# Altium PCB 深圳重合闸控制板.PcbDoc (part 2 of 2)
Units mm, origin at the board's own origin, x right, y up, seen from the top; angles counter-clockwise.
Board outline 137 x 115 mm, 2 copper layers (Top Layer, Bottom Layer); 314 components, 196 nets, 866 pads, 368 vias.
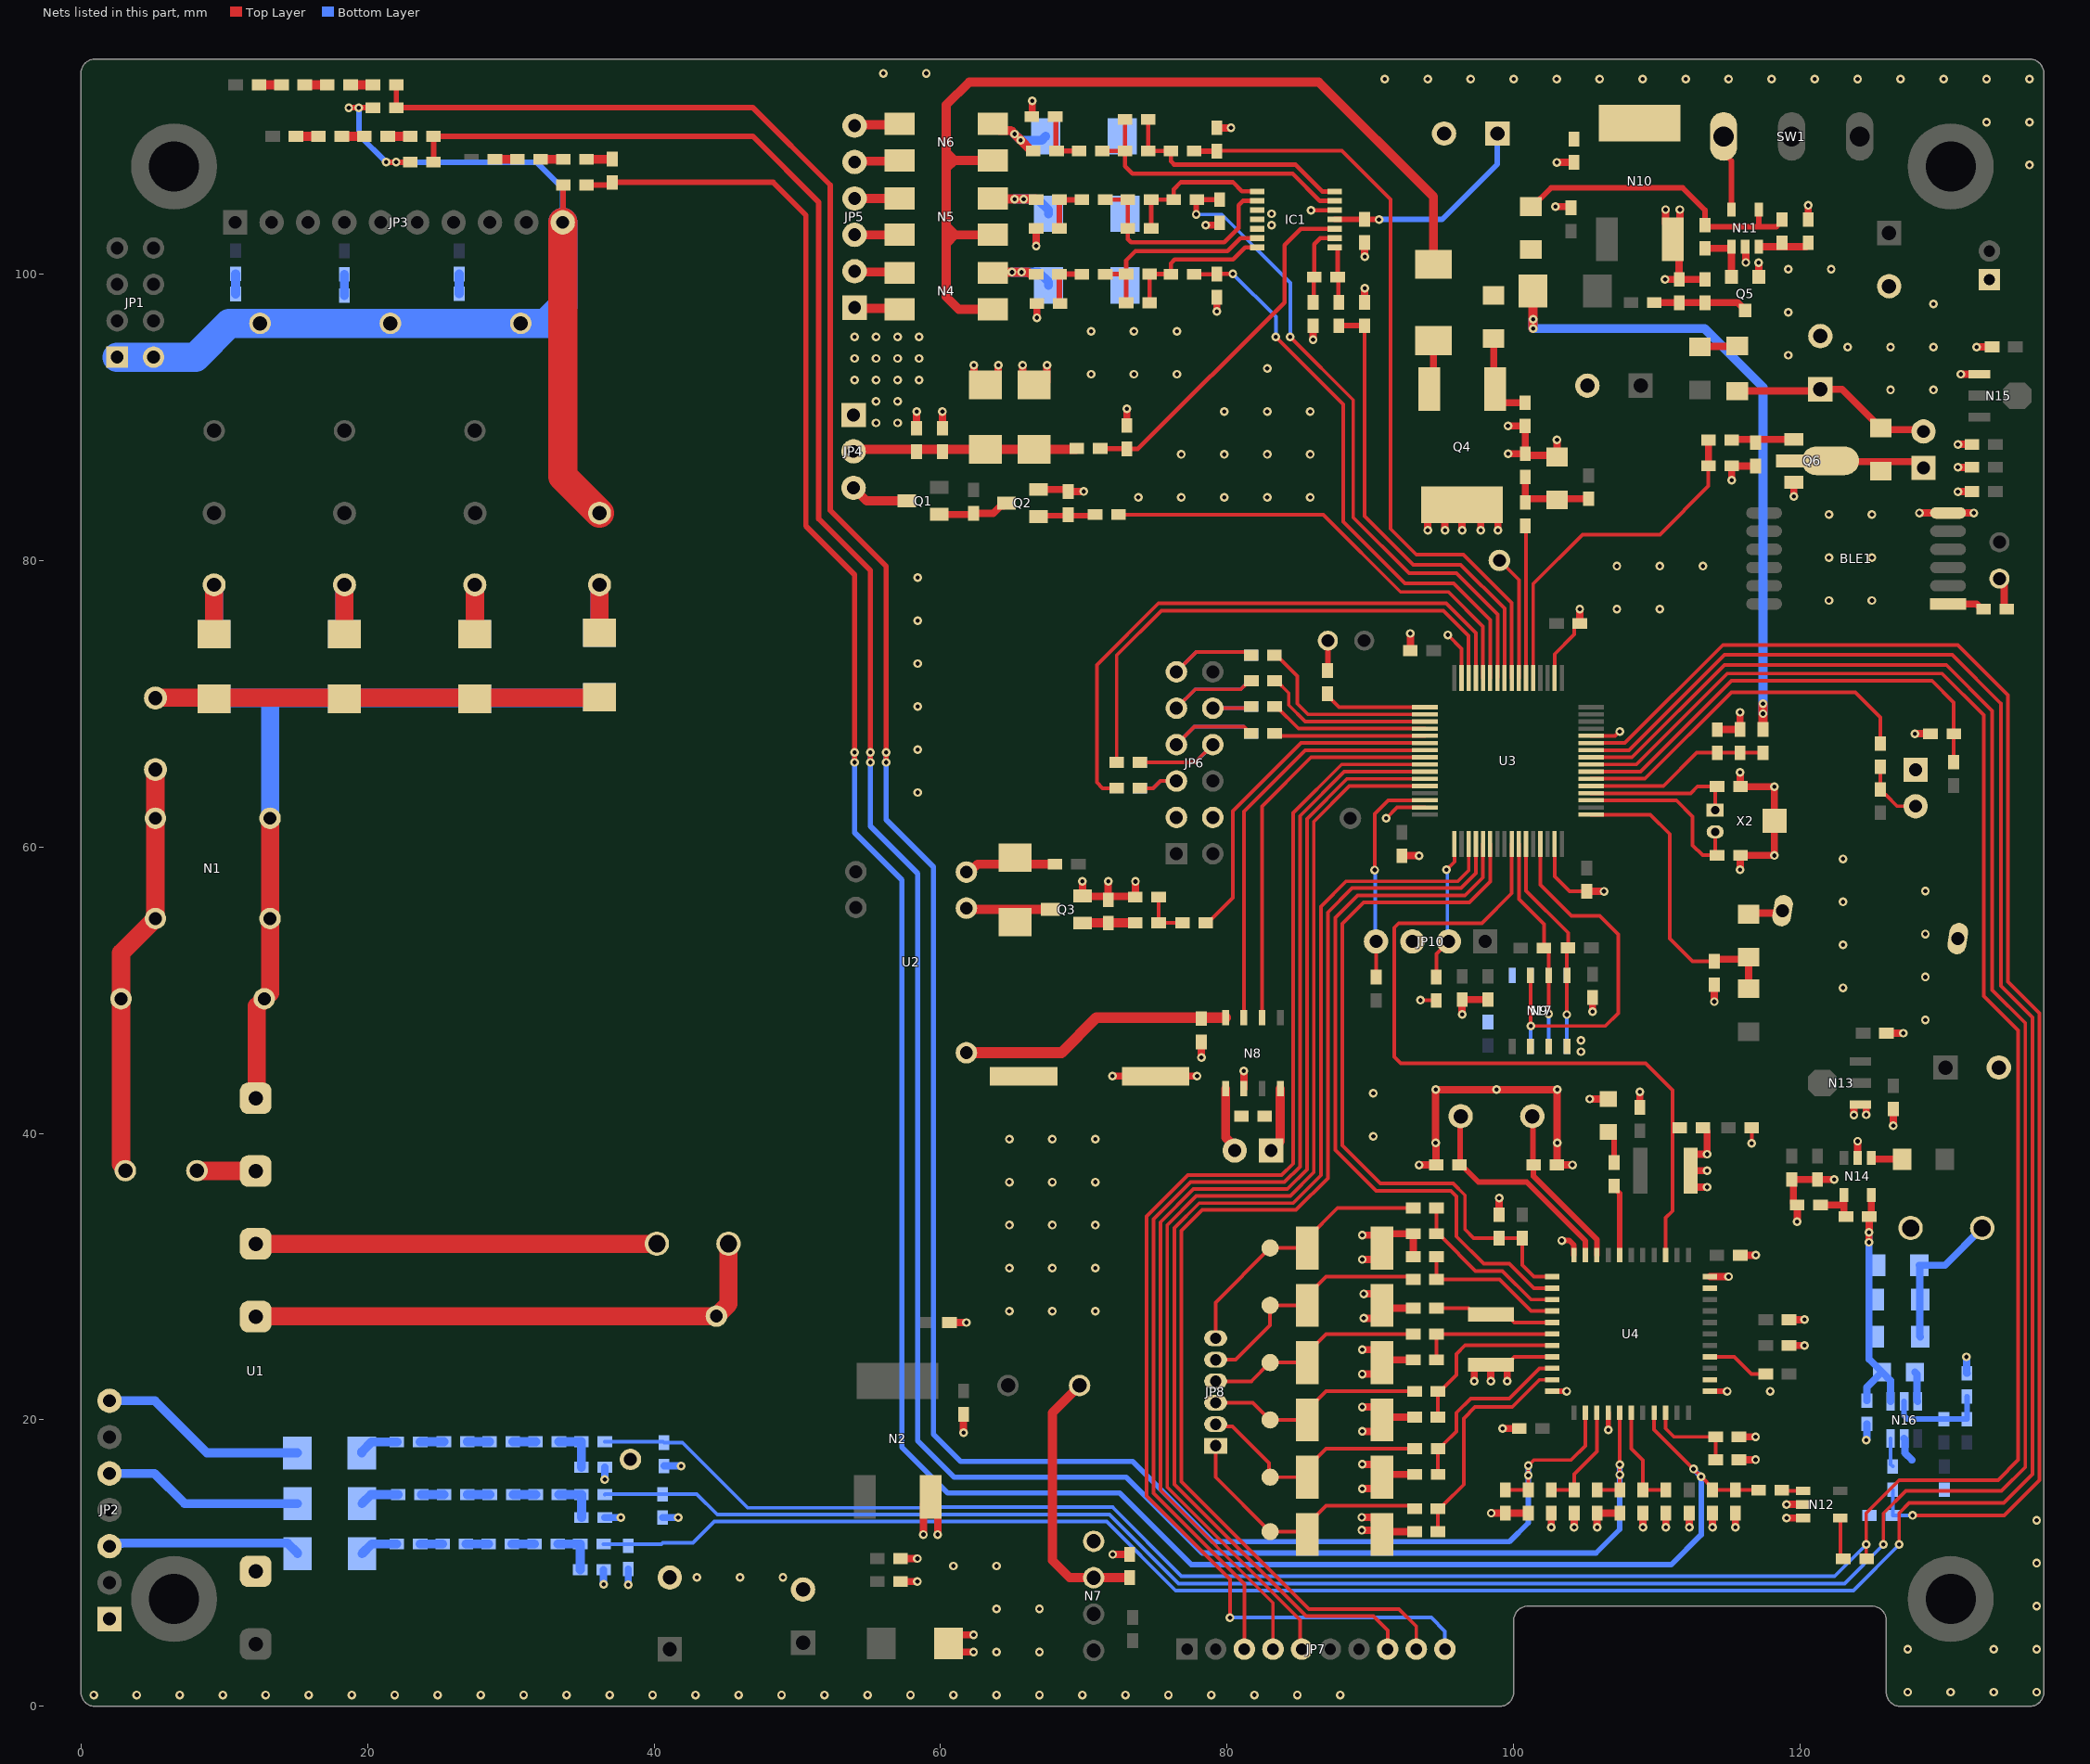
[diagram p2: the nets of this part, all layers, seen from the top]

## Via types
v1: diameter 0.61, hole 0.305, Top Layer to Bottom Layer, tented both sides, 368 vias

## Nets (pads, with @x,y where several pads share a name; then routed paths per layer and width w, separated by ;. In a path a pad name is that pad's centre, name@x,y a point inside that pad or via, vN(x,y) a via of type N, cw(c..) or ccw(c..) an arc to the next point about the centre after c; other vN are vias at no path point) (continued)
GND: BAT1.2 BLE1.6 C1.2 C3.2 C4.1 C5.1 C6.1 C7.1 C8.1 C9.2 C10.1 C11.1 C12.1 C13.1 C15.1 C18.1 C20.1 C22.1 C23.2 C24.2 C25.2 C26.1 C27.2 C28.1 C29.1 C30.1 C31.1 C32.1 C33.2 C34.2 C35.2 C36.2 C37.2 C38.2 C39.2 C40.2 C41.2 C42.2 C43.2 C44.2 C45.1 C46.2 C47.2 C48.2 C49.2 C50.1 C51.2 C52.1 C53.1 C54.1 C55.2 C56.1 C57.1 C58.2 C59.1 C60.1 C61.2 C62.2 C63.1 C64.1 C65.2 C66.2 C67.2 C68.2 C69.1 C70.2 C71.1 C72.2 C73.2 C74.1 C75.1 C76.1 C77.1 C79.2 C80.2 C81.2 C82.2 C83.2 C84.2 CR2.1 CR3.1 CR4.1 CX2.1 D5.1 D7.2 D10.1 IC1.5 IC1.10 IC1.11 IC1.12 JP1.1 JP1.2 JP2.1 JP3.10 JP4.1 JP6.3 JP6.4 JP10.3 JP11.1 JP13.1 LED1.2 N2.3 N3.2 N7.1 N8.6 N9.2 N9.3 N9.4 N10.3 N11.2 N12.2 N12.3 N13.1 N14.2 N15.1 N16.2 N17.1 N17.2 N17.3 N17.4 Q2.2 Q3.2 Q4.2 Q5.2 Q6.3 R9.1 R11.1 R16.1 R18.2 R20.1 R26.1 R38.2 R43.2 R44.2 R45.2 R50.2 R51.2 R52.2 R53.2 R54.2 R55.2 R56.2 R67.1 R70.2 R72.1 R73.2 R75.2 R77.1 R79.2 R81.2 R82.1 R83.1 R85.2 R87.1 R88.1 R90.1 R95.2 R96.2 R103.2 R108.2 R115.2 R117.2 R119.2 R130.2 R135.2 R137.2 Rp1.2 Rp2.2 Rp3.2 U1.14 U3.12 U3.18 U3.31 U3.47 U3.63 U4.8 U4.11 U4.15 U4.23 U4.24 U4.32 U4.33 U4.44 X2.3 | length 347.5
  Top Layer w0.254: v1(91.1,62) 91.854,62.754 U3.47@93.8,62.754 ; v1(93.5,49.3) 94.587,49.3 R67.1@94.6,49.287 ; v1(95.4,74.8) 96.359,73.841 U3.31@96.359,71.8 ; C35.2@97.25,23.477 97.623,23.85 C35.2@98.4,23.85 99.5,23.85 99.55,23.9 100.05,24.4 U4.8@102.7,24.4 ; U3.63@102.859,60.2 102.859,57.941 103.9,56.9 C47.2@105.1,56.9 ; U3.18@102.859,71.8 102.859,73.459 104.232,74.832 104.232,75.346 104.486,75.6 C43.2@104.613,75.6 ; U3.12@105.4,67.754 107.073,67.754 107.372,68.053 v1(107.4,68.053) ; v1(116.613,39.313) C60.1@116.613,40.4
  Top Layer w0.305: v1(85.85,104.45) IC1.5@87.5,104.45
  Top Layer w0.381: v1(18.7,111.6) v1(19.4,111.6) R9.1@20.387,111.6 ; v1(21.3,107.8) v1(22,107.8) R11.1@22.987,107.8 ; JP3.10@33.63,103.6 33.648,103.618 33.648,106.182 R16.1@33.666,106.2 ; U4.11@102.5,22 v1(103.7,22) ; v1(103.355,32.522) 103.878,32.522 104.2,32.2 U4.44@104.2,31.5 ; v1(106.6,19.3) U4.15@106.6,20.5 ; U4.23@113.7,22 v1(114.9,22)
  Top Layer w0.5: v1(115.8,58.4) 115.813,58.413 115.813,59.406 C58.2@115.826,59.419 115.835,59.41 118.191,59.41 v1(118.2,59.4) v1(118.2,64.2) 118.191,64.209 115.835,64.209 C59.1@115.826,64.219 115.813,64.231 115.813,65.187 v1(115.8,65.2)
  Top Layer w0.508: C4.1@57.208,8.719 v1(58.381,8.719) ; C5.1@57.208,10.319 v1(58.381,10.319) ; C6.1@58.327,89.41 v1(58.327,90.397) ; v1(58.8,12) 58.8,14.126 N2.3@59.3,14.626 59.8,14.126 v1(59.8,12) ; R20.1@60.127,89.41 v1(60.127,90.398) ; C7.1@60.613,26.8 v1(61.8,26.8) ; v1(61.6,19.1) C8.1@61.6,20.387 ; v1(62.3,3.8) 61.15,3.8 N3.2@60.55,4.4 61.15,5 v1(62.3,5) ; D5.1@62.327,92.46 v1(62.327,93.629) ; D5.1@64.027,92.46 v1(64.027,93.629) ; D7.2@65.727,92.46 v1(65.727,93.629) ; C10.1@66.4,111.1 v1(66.4,112.087) ; v1(66.67,101.943) C11.1@66.67,102.93 ; v1(66.72,96.943) C12.1@66.72,97.93 ; Q2.2@66.84,84.95 68.773,84.95 68.9,84.823 R26.1@68.9,84.813 v1(69.987,84.813) ; D7.2@67.427,92.46 v1(67.427,93.629) ; v1(69.902,57.598) Q3.2@69.902,56.587 69.945,56.544 C13.1@71.7,56.544 ; C13.1@71.7,56.313 C13.1@71.7,56.544 ; v1(71.7,57.6) C13.1@71.7,56.544 ; v1(72,44) C9.2@75,44 v1(77.9,44) ; v1(72.013,10.613) C18.1@73.2,10.613 ; C15.1@73,89.6 v1(73,90.587) ; v1(73.6,57.587) 73.6,56.513 R38.2@73.587,56.5 73.544,56.544 C13.1@71.7,56.544 ; v1(78.2,45.3) C20.1@78.2,46.387 ; v1(78.5,103.4) 79.355,103.4 79.482,103.527 R45.2@79.482,103.568 ; v1(79.282,97.381) R43.2@79.282,98.368 ; R44.2@79.282,110.194 v1(80.27,110.194) ; N8.6@81.165,43.125 v1(81.165,44.365) ; v1(86,95.4) R56.2@86,96.387 ; v1(89.4,12.3) 90.5,12.3 R50.2@90.8,12 ; v1(89.4,13.2) 90.254,13.2 90.8,12.654 R50.2@90.8,12.354 ; v1(89.431,15.2) R51.2@90.6,15.2 ; v1(89.431,16.9) R51.2@90.6,16.9 ; v1(89.431,19.2) R52.2@90.6,19.2 ; v1(89.431,20.9) R52.2@90.6,20.9 ; v1(89.431,23.2) R53.2@90.6,23.2 ; v1(89.431,24.9) R53.2@90.6,24.9 ; v1(89.431,31.2) R55.2@90.6,31.2 ; v1(89.431,32.9) R55.2@90.6,32.9 ; v1(89.531,27.1) R54.2@90.7,27.1 ; v1(89.531,28.8) R54.2@90.7,28.8 ; C23.2@89.6,98.013 v1(89.6,99) ; v1(89.6,101.2) C22.1@89.6,102.187 ; R50.2@90.254,12.9 R50.2@90.8,12.354 ; R51.2@90.8,16 91,16.2 C32.1@93.092,16.2 ; R52.2@90.8,20 90.988,20.188 C31.1@93.084,20.188 ; R53.2@90.8,24 90.994,24.194 C26.1@92.987,24.194 ; R54.2@90.8,28 91,27.8 C27.2@92.987,27.8 ; R55.2@90.8,32 90.8,32.454 91.346,33 C29.1@92.987,33 C28.1@92.987,31.4 ; C24.2@92.2,59.387 v1(93.4,59.387) ; C25.2@92.787,73.7 v1(92.787,74.9) ; C30.1@93.082,12.2 91,12.2 R50.2@90.8,12 ; v1(93.4,37.8) C34.2@94.587,37.8 94.567,37.82 94.567,39.327 v1(94.548,39.347) 94.554,39.353 94.554,43.052 v1(94.561,43.058) ; v1(94,82.1) Q4.2@94,83.3 ; v1@94.561,43.059 v1(98.798,43.059) v1@103.035,43.059 ; v1(95.2,82.1) Q4.2@95.2,83.3 ; v1(96.4,48.3) 96.4,49.336 C36.2@96.407,49.343 C37.2@98.207,49.343 ; v1(96.4,82.1) Q4.2@96.4,83.3 ; v1(97.25,22.7) C35.2@97.25,23.477 ; v1(97.7,82.1) Q4.2@97.7,83.3 ; v1(98.4,22.7) C35.2@98.4,23.85 ; v1(98.432,13.492) C39.2@99.419,13.492 R73.2@101.019,13.492 ; v1(98.9,82.1) Q4.2@98.9,83.3 ; C38.2@98.986,34.317 v1(98.986,35.486) ; v1(99.231,19.4) C40.2@100.4,19.4 ; v1(99.55,22.7) C35.2@99.55,23.9 ; v1(99.6,89.387) R70.2@100.8,89.387 100.806,89.381 100.806,87.449 R72.1@100.813,87.443 ; v1(99.613,87.443) R72.1@100.813,87.443 ; v1(102.619,12.505) C42.2@102.619,13.492 ; v1(102.913,104.7) C45.1@103.9,104.7 ; v1(103,107.787) C46.2@104.2,107.787 ; v1(103.022,88.421) D10.1@103.022,87.221 102.911,87.332 100.924,87.332 R72.1@100.813,87.443 ; v1(103.036,43.06) v1(103.036,39.34) 103.036,37.823 C41.2@103.013,37.8 v1(104.1,37.8) ; v1(104.219,12.505) R75.2@104.219,13.492 ; C43.2@104.613,75.6 v1(104.613,76.595) ; C47.2@105.1,56.9 v1(106.3,56.9) ; v1(105.3,42.4) LED1.2@106.6,42.4 ; v1(105.5,48.5) R77.1@105.5,49.487 ; v1(105.819,12.505) C48.2@105.819,13.492 R79.2@107.419,13.492 ; C50.1@108.8,41.813 v1(108.8,42.9) ; v1(109.019,12.505) C51.2@109.019,13.492 ; v1(110.563,99.613) R82.1@111.55,99.613 ; N10.3@110.6,103.5 v1(110.6,104.487) ; v1(110.619,12.505) R81.2@110.619,13.492 ; N10.3@111.1,102.426 111.55,101.976 R82.1@111.55,99.613 ; N10.3@111.6,103.5 v1(111.6,104.487) ; v1(112.257,12.505) C53.1@112.257,13.492 ; C52.1@113.213,40.4 113.246,40.4 113.5,40.146 v1(113.5,38.55) 112.723,38.55 112.35,38.177 C49.2@112.35,37.4 ; R83.1@113.35,99.613 R82.1@111.55,99.613 ; v1(113.5,36.25) 112.723,36.25 112.35,36.623 C49.2@112.35,37.4 ; v1(113.5,37.4) C49.2@112.35,37.4 ; U4.33@113.7,30 v1(115,30) ; v1(113.876,12.505) C54.1@113.876,13.492 ; v1(114,49.2) C55.2@114,50.387 ; R88.1@114.213,68.19 114.218,68.195 115.789,68.195 C61.2@115.794,68.2 v1(115.794,69.4) ; R85.2@115.213,86.6 R85.2@115.216,86.597 ; v1(115.216,85.609) R85.2@115.216,86.597 ; v1(115.476,12.505) R90.1@115.476,13.492 ; C56.1@115.72,17.219 v1(116.881,17.219) ; R87.1@115.72,18.819 v1(116.881,18.819) ; C57.1@115.813,31.5 v1(116.9,31.5) ; N11.2@116.15,101.905 116.2,101.855 v1(116.2,100.8) ; C62.2@116.879,86.587 116.873,86.594 115.219,86.594 R85.2@115.216,86.597 ; Q5.2@117.1,99.8 v1(117.1,100.787) ; v1(119.044,13.15) N12.3@120.205,13.15 ; v1(119.044,14.1) N12.2@120.205,14.1 ; C63.1@119.213,25.2 v1(120.3,25.2) ; C64.1@119.213,27 v1(120.3,27) ; v1(119.55,84.463) Q6.3@119.55,85.45 ; v1(119.787,33.839) R95.2@119.787,35 119.66,35 119.514,35.146 119.514,36.673 C66.2@119.4,36.787 R96.2@121.2,36.787 v1(122.361,36.787) ; C67.2@120.55,103.8 v1(120.55,104.787) ; v1(123.744,41.283) 123.744,41.971 123.79,42.017 N13.1@124.194,42.017 124.554,42.017 124.6,41.971 v1(124.6,41.3) ; N14.2@124,38.295 v1(124,39.456) ; C69.1@126.013,47 v1(127.2,47) ; v1(126.489,40.543) C71.1@126.489,41.704 ; v1(128,67.9) C73.2@129.087,67.9 ; v1(128.312,83.312) BLE1.6@130.312,83.312 v1(132.112,83.312) ; v1(131,84.8) C74.1@131.987,84.8 ; v1(131,86.5) C75.1@131.987,86.5 ; v1(131,88.1) C76.1@131.987,88.1 ; v1(131.2,93) N15.1@132.5,93 ; v1(132.3,94.9) C77.1@133.387,94.9 ; R50.2@90.8,12 R50.2@90.8,12.354
  Top Layer w2.032: JP3.10@33.63,103.6 33.63,85.87 R18.2@36.2,83.3
  Bottom Layer w0.381: v1(18.7,111.6) v1(19.4,111.6) 19.4,109.7 v1(21.3,107.8) v1(22,107.8) 31.787,107.8 33.63,105.957 JP3.10@33.63,103.6
  Bottom Layer w0.508: v1(36.479,8.521) R119.2@36.479,9.535 ; v1(36.563,15.837) R117.2@36.563,16.7 ; R115.2@36.568,13.181 v1(37.681,13.181) ; v1(38.2,8.5) C84.2@38.2,9.587 ; C83.2@40.6,13.187 v1(41.687,13.187) ; C82.2@40.7,16.787 v1(41.887,16.787) ; v1(124.6,18.6) 124.6,18.627 124.65,18.677 C80.2@124.65,19.725 ; N16.2@127.25,18.695 127.296,18.649 127.296,17.704 127.8,17.2 ; v1(131.6,24.4) 131.616,24.384 131.616,23.271 R103.2@131.631,23.255
  Bottom Layer w2.032: JP1.1@2.53,94.19 JP1.2@5.07,94.19 7.99,94.19 10.349,96.549 Rp3.2@30.7,96.55 32.44,96.55 33.63,97.74 JP3.10@33.63,103.6
  other v1: 0.9,0.8 3.9,0.8 6.9,0.8 9.9,0.8 12.9,0.8 15.9,0.8 18.9,0.8 21.9,0.8 24.9,0.8 27.9,0.8 30.9,0.8 33.9,0.8 36.9,0.8 39.9,0.8 42.9,0.8 45.9,0.8 48.9,0.8 51.9,0.8 54.9,0.8 57.9,0.8 60.9,0.8 63.9,0.8 66.9,0.8 69.9,0.8 72.9,0.8 75.9,0.8 78.9,0.8 81.9,0.8 84.9,0.8 87.9,0.8 127.5,1 130.5,1 133.5,1 136.5,1 63.9,3.8 66.9,3.8 127.5,4 133.5,4 136.5,4 63.9,6.8 66.9,6.8 136.5,7 43,9 46,9 49,9 60.9,9.8 63.9,9.8 136.5,10 136.5,13 117.9,22 64.8,27.6 67.8,27.6 70.8,27.6 64.8,30.6 67.8,30.6 70.8,30.6 64.8,33.6 67.8,33.6 70.8,33.6 64.8,36.6 67.8,36.6 70.8,36.6 64.8,39.6 67.8,39.6 70.8,39.6 90.2,39.8 90.2,42.8 104.7,45.7 104.7,46.5 128.728,47.92 122.991,50.165 128.728,50.92 122.991,53.165 128.728,53.92 122.991,56.165 128.728,56.92 122.991,59.165 58.4,63.8 58.4,66.8 58.4,69.8 58.4,72.8 58.4,75.8 107.2,76.6 110.2,76.6 122,77.2 125,77.2 58.4,78.8 107.2,79.6 110.2,79.6 113.2,79.6 122,80.2 125,80.2 122,83.2 125,83.2 73.8,84.4 76.8,84.4 79.8,84.4 82.8,84.4 85.8,84.4 76.8,87.4 79.8,87.4 82.8,87.4 85.8,87.4 55.5,89.6 57,89.6 79.8,90.4 82.8,90.4 85.8,90.4 55.5,91.1 57,91.1 126.3,91.9 129.3,91.9 54,92.6 55.5,92.6 57,92.6 58.5,92.6 70.5,93 73.5,93 76.5,93 82.8,93.4 54,94.1 55.5,94.1 57,94.1 58.5,94.1 119.156,94.325 123.3,94.9 126.3,94.9 129.3,94.9 54,95.6 55.5,95.6 57,95.6 58.5,95.6 70.5,96 73.5,96 76.5,96 119.156,97.325 129.3,97.9 119.156,100.325 122.156,100.325 83.1,103.4 83.1,104.2 136,107.6 133,110.6 136,110.6 91,113.6 94,113.6 97,113.6 100,113.6 103,113.6 106,113.6 109,113.6 112,113.6 115,113.6 118,113.6 121,113.6 124,113.6 127,113.6 130,113.6 133,113.6 136,113.6 56,114 59,114
GND1: CX1.1 D17.1 D18.1 D22.1 D23.1 N1.2 N1.4 U1.1 | length 55.3
  Top Layer w1.27: U1.1@12.2,42.45 12.284,42.534 12.284,48.884 CX1.1@12.8,49.4 13.2,49.8 N1.2@13.2,55 N1.4@13.2,62
  Bottom Layer w1.27: D23.1@9.3,70.35 9.35,70.4 13.128,70.4 ; N1.4@13.2,62 13.2,70.328 13.128,70.4 ; D17.1@36.2,70.45 36.15,70.4 13.128,70.4
IRQ: U3.53 U4.2 | length 50.8
  Top Layer w0.254: U3.53@97.859,60.2 97.859,57.859 96.6,56.6 89.1,56.6 87.548,55.048 87.548,38.852 90.4,36 95.6,36 96,35.6 96,32.8 97.9,30.9 99.7,30.9 101.4,29.2 U4.2@102.7,29.2
LCD_RX: JP7.4 U3.43 | length 78.7
  Top Layer w0.254: JP7.4@83.2,4 83.2,7.228 75.335,15.093 75.335,33.807 77.645,36.117 84.2,36.117 85.565,37.483 85.565,61.965 88.354,64.754 U3.43@93.8,64.754
LCD_TX: JP7.3 U3.42 | length 78.9
  Top Layer w0.254: JP7.3@81.2,4 81.2,8.545 74.852,14.893 74.852,34.007 77.445,36.6 84,36.6 85.083,37.683 85.083,62.165 88.172,65.254 U3.42@93.8,65.254
LED: R58.1 U3.33 | length 7.3
  Top Layer w0.254: R58.1@87,70.687 87,70.56 87.806,69.754 U3.33@93.8,69.754
NetA1_1: A1.1 JP8.1 R50.1 R64.2 | length 19.1
  Top Layer w0.254: JP8.1@79.2,18.2 79.2,16 A1.1@83,12.2 85.4,12.2 R50.1@85.6,12 85.6,12.7 86.9,14 92.882,14 R64.2@93.082,13.8
NetA2_1: A2.1 JP8.2 R51.1 R66.2 | length 17.2
  Top Layer w0.254: JP8.2@79.2,19.7 79.362,19.538 80.355,19.538 82.912,16.981 82.912,16.088 A2.1@83,16 R51.1@85.6,16 85.6,16.7 86.9,18 87.229,18 R66.2@93.092,18
NetA3_1: A3.1 JP8.3 R52.1 R65.2 | length 15.6
  Top Layer w0.254: JP8.3@79.2,21.2 81.8,21.2 A3.1@83,20 R52.1@85.6,20 85.6,20.7 86.9,22 93.071,22 R65.2@93.084,21.987
NetA4_1: A4.1 JP8.4 R53.1 R61.2 | length 15.6
  Top Layer w0.254: JP8.4@79.2,22.7 81.7,22.7 A4.1@83,24 R53.1@85.6,24 85.6,24.7 86.9,26 92.981,26 R61.2@92.987,25.994
NetA5_1: A5.1 JP8.5 R54.1 R62.2 | length 17.5
  Top Layer w0.254: JP8.5@79.2,24.2 80.6,24.2 83,26.6 A5.1@83,28 R54.1@85.6,28 85.6,28.7 86.9,30 92.787,30 R62.2@92.987,29.8
NetA6_1: A6.1 JP8.6 R55.1 R63.2 | length 19.4
  Top Layer w0.254: JP8.6@79.2,25.7 79.2,28.2 A6.1@83,32 R55.1@85.6,32 85.6,32.7 87.7,34.8 R63.2@92.987,34.8
NetBAT1_1: BAT1.1 D13.1 | length 2.5
  Top Layer w0.5: D13.1@116.394,55.3 116.479,55.386 118.606,55.386 BAT1.1@118.77,55.55
NetBLE1_1: BLE1.1 R102.2 | length 2.6
  Top Layer w0.5: BLE1.1@130.312,76.962 132.298,76.962 132.66,76.6 R102.2@132.787,76.6
NetC3_2: C12.2 R23.1 R29.2 | length 3.6
  Top Layer w0.381: C12.2@68.295,97.93 R23.1@68.295,99.981 R29.2@69.87,99.981
NetC5_1: C16.1 IC1.14 R35.1 R39.2 | length 10.8
  Top Layer w0.305: C16.1@74.578,97.982 R35.1@74.578,99.994 74.585,99.988 76.063,99.988 R39.2@76.07,99.981 76.07,100.734 76.335,101 80.4,101 81.25,101.85 IC1.14@82.1,101.85
NetC5_2: C16.2 IC1.13 R29.1 R35.2 | length 14
  Top Layer w0.305: R29.1@71.495,99.981 71.502,99.988 72.946,99.988 R35.2@72.953,99.994 C16.2@72.953,97.982 ; R35.2@72.953,100.194 72.953,100.953 73.6,101.6 80.026,101.6 80.926,102.5 IC1.13@82.1,102.5
NetC6_2: C59.2 U3.4 X2.1 | length 10.7
  Top Layer w0.254: U3.4@105.4,63.746 112.346,63.746 112.819,64.219 C59.2@114.2,64.219 114.063,64.081 X2.1@114.063,62.569
NetC7_1: C58.1 U3.3 X2.2 | length 13.2
  Top Layer w0.254: U3.3@105.4,63.238 111.362,63.238 112.487,62.113 112.487,60.113 113.181,59.419 C58.1@114.2,59.419 114.063,59.556 X2.2@114.063,61.049
NetC8_1: C41.1 U4.42 X1.1 | length 11.6
  Top Layer w0.381: X1.1@101.3,41.2 101.344,41.156 101.344,37.844 C41.1@101.387,37.8 101.387,37.013 105.8,32.6 U4.42@105.8,31.5
NetC9_1: C55.1 D12.2 D13.2 U3.1 | length 21.8
  Top Layer w0.254: U3.1@105.4,62.254 109.546,62.254 110.9,60.9 110.9,53.6 112.487,52.013 C55.1@114,52.013
  Top Layer w0.5: C55.1@114,52.013 114,52.025 114.131,52.156 116.25,52.156 D13.2@116.394,52.3 D12.2@116.394,50.1
NetC11_1: C34.1 U4.43 X1.2 | length 15.4
  Top Layer w0.381: X1.2@96.3,41.2 96.256,41.156 96.256,37.843 C34.1@96.213,37.8 96.34,37.8 97.54,36.6 100.902,36.6 105,32.502 U4.43@105,31.5
NetC14_2: C11.2 R24.1 R30.2 | length 3.6
  Top Layer w0.381: C11.2@68.295,103.181 R24.1@68.295,105.181 R30.2@69.87,105.181
NetC16_1: C17.1 IC1.8 R36.1 R41.2 | length 10.6
  Top Layer w0.305: C17.1@74.695,103.181 R36.1@74.695,105.181 R41.2@76.27,105.181 76.27,105.912 76.758,106.4 80.4,106.4 81.04,105.76 82.091,105.76 IC1.8@82.1,105.75
NetC16_2: C17.2 IC1.9 R30.1 R36.2 | length 15.6
  Top Layer w0.305: R30.1@71.495,105.181 R36.2@73.07,105.181 C17.2@73.07,103.181 73.07,102.423 73.293,102.2 79.8,102.2 80.8,103.2 80.8,104.8 81.1,105.1 IC1.9@82.1,105.1
NetC17_1: C61.1 R88.2 R92.2 U3.5 | length 13
  Top Layer w0.254: U3.5@105.4,64.254 110.454,64.254 112.774,66.574 114.213,66.574 C61.1@115.794,66.574 R92.2@117.4,66.574
NetC19_1: C27.1 C35.1 U4.5 | length 8.5
  Top Layer w0.254: C27.1@94.613,27.8 96.85,27.8 97.3,27.35 C35.1@98.4,27.35 99.5,27.35 100.05,26.8 U4.5@102.7,26.8
NetC24_2: C10.2 R22.1 R28.2 | length 4
  Top Layer w0.381: C10.2@68,110.981 68.048,110.933 68.048,108.628 R22.1@68.095,108.581 R28.2@69.67,108.581
NetC25_1: C14.1 IC1.7 R34.1 R40.2 | length 16.8
  Top Layer w0.305: C14.1@74.495,110.781 R34.1@74.495,108.581 R40.2@76.07,108.581 76.07,107.858 76.293,107.635 84.765,107.635 86.65,105.75 IC1.7@87.5,105.75
NetC25_2: C14.2 IC1.6 R28.1 R34.2 | length 20.5
  Top Layer w0.305: R28.1@71.295,108.581 R34.2@72.87,108.581 ; C14.2@72.87,110.781 R34.2@72.87,108.581 ; IC1.6@87.5,105.1 86.474,105.1 84.574,107 73.4,107 72.87,107.53 R34.2@72.87,108.581
NetC29_1: C62.1 Q6.1 R86.1 | length 4.4
  Top Layer w0.5: R86.1@115.213,88.4 115.263,88.45 116.879,88.45 Q6.1@119.55,88.45
NetC30_1: C65.1 D14.2 JP12.2 R89.1 | length 14.3
  Top Layer w0.5: R89.1@115.6,91.825 121.285,91.825 C65.1@121.4,91.94 122.914,91.94 125.111,89.743 125.111,89.643 125.511,89.243 D14.2@125.611,89.243 125.732,89.122 128.48,89.122 JP12.2@128.601,89.001
NetC32_2: C56.2 R87.2 U4.20 | length 6.4
  Top Layer w0.254: U4.20@110.6,20.5 110.6,19.4 111.181,18.819 R87.2@114.094,18.819 C56.2@114.094,17.219
NetC36_1: C42.1 R75.1 U4.14 | length 7.6
  Top Layer w0.254: C42.1@102.619,15.118 R75.1@104.219,15.118 104.219,16.219 105.8,17.8 U4.14@105.8,20.5
NetC44_1: C51.1 R81.1 U4.17 | length 7.3
  Top Layer w0.254: U4.17@108.2,20.5 108.2,18 109.019,17.181 C51.1@109.019,15.118 R81.1@110.619,15.118
NetC46_2: C6.2 D5.2 D7.1 JP4.2 R20.2 R27.2 | length 15.7
  Top Layer w0.635: JP4.2@53.927,87.61 54.064,87.747 69.451,87.747 R27.2@69.515,87.81
NetC48_2: C15.2 IC1.3 R27.1 | length 25.1
  Top Layer w0.305: C15.2@73,87.787 73.787,87.787 84,98 84,102 85.15,103.15 IC1.3@87.5,103.15
  Top Layer w0.381: R27.1@71.14,87.81 71.152,87.799 72.989,87.799 C15.2@73,87.787
NetC52_1: C67.1 N11.3 R94.1 | length 3.6
  Top Layer w0.5: N11.3@117.1,101.905 120.408,101.905 120.55,102.047 C67.1@120.55,102.174
NetC63_1: C2.1 U1.5 | length 28
  Top Layer w1.27: U1.5@12.2,32.29 C2.1@40.2,32.29
NetC63_2: C2.2 CX2.2 U1.7 | length 37.6
  Top Layer w1.27: U1.7@12.2,27.21 12.217,27.227 44.336,27.227 CX2.2@44.354,27.245 44.354,27.258 45.2,28.104 C2.2@45.2,32.3
NetC64_1: C21.1 JP9.1 N8.8 | length 4.6
  Top Layer w0.635: JP9.1@83.07,38.8 83.705,39.435 N8.8@83.705,43.125
NetC64_2: C21.2 JP9.2 N8.5 | length 4.6
  Top Layer w0.635: N8.5@79.895,43.125 79.895,39.723 80.53,39.088 JP9.2@80.53,38.8
NetC68_2: C18.2 L2.1 N7.2 | length 18.9
  Top Layer w0.635: L2.1@69.7,22.4 67.8,20.5 67.8,10.2 69,9 70.666,9 N7.2@70.685,8.982 70.688,8.984 73.197,8.984 C18.2@73.2,8.987
NetC70_1: C9.1 C20.2 N8.4 U2.3 | length 19.1
  Top Layer w0.762: U2.3@61.8,45.634 68.434,45.634 70.875,48.075 78.2,48.075 N8.4@79.895,48.075
NetC72_2: C13.2 Q3.1 R37.2 | length 3.7
  Top Layer w0.635: Q3.1@69.902,54.687 69.908,54.694 73.581,54.694 R37.2@73.587,54.7
NetC77_1: C78.1 N16.5 R103.1 R104.2 | length 7.1
  Bottom Layer w0.381: N16.5@127.25,21.295 127.25,20.278 127.473,20.055 C78.1@131.631,20.055 R103.1@131.631,21.63
NetC81_1: C70.1 D16.1 R105.2 R106.2 | length 10.5
  Bottom Layer w0.5: R105.2@128.375,25.8 128.337,25.837 128.337,28.4 128.337,30.763 D16.1@128.3,30.8 130.1,30.8 C70.1@132.7,33.4
NetCR1_2: CR2.2 N4.4 R23.2 | length 6.2
  Top Layer w0.635: N4.4@63.65,100.07 63.705,100.125 v1(64.985,100.125) 66.107,100.125 66.188,100.044 66.606,100.044 R23.2@66.67,99.981
  Bottom Layer w0.635: v1(64.985,100.125) v1(65.661,100.125) 66.834,100.125 67.533,99.427 CR2.2@67.533,99.2
NetCR2_2: CR3.2 N5.4 R24.2 | length 6
  Top Layer w0.635: N5.4@63.65,105.27 63.695,105.225 v1(65.16,105.225) v1(65.8,105.225) 66.625,105.225 R24.2@66.67,105.181
  Bottom Layer w0.635: v1(65.16,105.225) v1(65.8,105.225) 66.508,105.225 66.58,105.153 66.834,105.153 67.533,104.454 CR3.2@67.533,104.2
NetCR3_2: CR4.2 N6.4 R22.2 | length 6.1
  Top Layer w0.635: N6.4@63.65,110.47 64.107,110.013 64.911,110.013 v1(65.159,109.764) v1(65.595,109.328) 66.279,108.644 66.343,108.581 R22.2@66.47,108.581
  Bottom Layer w0.635: v1(65.159,109.764) v1(65.595,109.328) 67.061,109.328 CR4.2@67.333,109.6
NetCR4_1: CR1.1 Q4.3 | length 3.5
  Top Layer w0.5: Q4.3@94.1,91.974 94.4,92.274 CR1.1@94.4,95.333
NetCX1_2: CX1.2 L1.2 N1.1 N1.3 RX1.2 | length 29.1
  Top Layer w1.27: L1.2@3.1,37.5 3.1,37.562 2.8,37.862 CX1.2@2.8,49.4 2.8,52.6 N1.1@5.2,55 N1.3@5.2,62 ; N1.3@5.156,62.044 N1.3@5.2,62 ; RX1.2@5.2,65.4 N1.3@5.2,62
NetD3_1: D14.1 JP12.1 Q6.2 | length 6.7
  Top Layer w0.5: Q6.2@122.1,86.95 122.157,86.893 128.169,86.893 JP12.1@128.601,86.461
NetD4_2: D11.2 R89.2 | length 2.6
  Top Layer w0.5: D11.2@113,94.9 113.037,94.937 115.563,94.937 R89.2@115.6,94.975
NetD8_1: D9.1 N11.4 R84.2 R94.2 | length 21.3
  Top Layer w0.381: D9.1@101.2,104.7 101.3,104.7 102.6,106 111.8,106 113.35,104.45 R84.2@113.35,103.413 113.47,103.292 117.112,103.292 ; N11.4@117.1,104.495 117.112,104.483 117.112,103.292 ; R94.2@118.721,103.8 118.721,103.673 118.34,103.292 117.112,103.292
NetD9_2: D10.2 R71.2 R72.2 R76.1 | length 6.2
  Top Layer w0.5: R71.2@100.813,84.043 R71.2@100.813,84.17 ; R72.2@100.813,85.818 R71.2@100.813,84.17 ; R76.1@105.222,84.308 100.95,84.308 R71.2@100.813,84.17
NetD10_2: D1.1 D23.2 R1.1 | length 6.9
  Top Layer w1.27: D1.1@9.3,74.85 R1.1@9.3,78.3
  Bottom Layer w1.27: D23.2@9.3,74.85 R1.1@9.3,78.3
NetD11_2: D1.2 D2.2 D3.2 D4.2 RX1.1 | length 31
  Top Layer w1.27: RX1.1@5.2,70.4 5.225,70.425 36.175,70.425 D4.2@36.2,70.45
NetD12_2: D2.1 D22.2 R7.1 | length 6.9
  Top Layer w1.27: D2.1@18.4,74.85 18.402,74.852 18.402,78.298 R7.1@18.404,78.3
  Bottom Layer w1.27: D22.2@18.4,74.85 18.402,74.852 18.402,78.298 R7.1@18.404,78.3
NetD14_1: D3.1 D18.2 R13.1 | length 6.9
  Top Layer w1.27: D3.1@27.5,74.85 R13.1@27.5,78.3
  Bottom Layer w1.27: D18.2@27.5,74.85 R13.1@27.5,78.3
NetD16_1: D4.1 D17.2 R18.1 | length 6.7
  Top Layer w1.27: D4.1@36.2,74.95 R18.1@36.2,78.3
  Bottom Layer w1.27: D17.2@36.2,74.95 R18.1@36.2,78.3
NetD18_1: D6.1 Q3.3 U2.2 | length 6.2
  Top Layer w0.635: U2.2@61.8,55.724 61.887,55.637 67.813,55.637 Q3.3@67.9,55.55
NetD18_2: D6.2 R25.2 U2.1 | length 6.4
  Top Layer w0.635: U2.1@61.8,58.244 62.034,58.244 62.59,58.8 R25.2@67.987,58.8
NetD20_2: D15.2 N14.1 | length 2
  Top Layer w0.5: N14.1@124.95,38.295 124.95,38.25 125,38.2 D15.2@126.9,38.2
NetD21_1: D21.1 JP2.7 | length 14.6
  Bottom Layer w0.635: JP2.7@2,21.34 5.16,21.34 8.8,17.7 D21.1@15.1,17.7
NetD21_2: D21.2 R133.1 | length 2.8
  Bottom Layer w0.635: D21.2@19.6,17.7 19.6,17.779 20.283,18.462 R133.1@22.058,18.462
NetD22_1: D20.1 JP2.5 | length 14
  Bottom Layer w0.635: JP2.5@2,16.26 5.14,16.26 7.238,14.162 D20.1@15.121,14.162
NetD22_2: D20.2 R132.1 | length 2.8
  Bottom Layer w0.635: D20.2@19.621,14.162 20.24,14.781 R132.1@22.142,14.781
NetD23_1: D19.1 JP2.3 | length 13.6
  Bottom Layer w0.635: JP2.3@2,11.18 2.204,11.384 2.887,11.384 2.904,11.402 14.438,11.402 15.121,10.719 D19.1@15.121,10.662
NetD23_2: D19.2 R134.1 | length 2.7
  Bottom Layer w0.635: D19.2@19.621,10.662 20.294,11.335 R134.1@22.053,11.335
NetDx1_2: Dx2.2 R102.1 | length 2.3
  Top Layer w0.5: Dx2.2@134,78.71 134.235,78.475 134.235,76.731 134.366,76.6 R102.1@134.413,76.6
NetDx2_2: Dx1.2 R58.2 | length 2
  Top Layer w0.254: R58.2@87,72.313 R58.2@87.03,72.343
  Top Layer w0.381: R58.2@87.03,72.343 Dx1.2@87.03,74.3
NetDZ1_1: DZ1.1 Q4.1 R70.1 | length 6.3
  Top Layer w0.5: DZ1.1@98.6,95.5 98.6,92.074 Q4.1@98.7,91.974 98.7,91.525 99.212,91.013 R70.1@100.8,91.013
NetIC1_1: IC1.1 R57.2 R59.2 | length 4.1
  Top Layer w0.305: IC1.1@87.5,101.85 87.699,101.85 87.708,101.841 R57.2@87.708,99.781 87.754,99.735 87.754,98.059 R59.2@87.8,98.013
NetIC1_2: IC1.2 R56.1 R57.1 | length 5.7
  Top Layer w0.305: R56.1@86,98.013 86.041,98.054 86.041,99.74 R57.1@86.082,99.781 86.082,102.082 86.491,102.491 87.491,102.491 IC1.2@87.5,102.5
NetJP1_1: JP5.1 N4.2 | length 3.2
  Top Layer w0.635: JP5.1@54,97.65 54.06,97.59 57.09,97.59 N4.2@57.15,97.53
NetJP1_2: JP5.2 N4.1 | length 3.2
  Top Layer w0.635: JP5.2@54,100.19 54.06,100.13 57.09,100.13 N4.1@57.15,100.07
NetJP1_3: JP5.3 N5.2 | length 3.1
  Top Layer w0.635: JP5.3@54,102.73 N5.2@57.15,102.73
NetJP1_4: JP5.4 N5.1 | length 3.1
  Top Layer w0.635: JP5.4@54,105.27 N5.1@57.15,105.27
NetJP1_5: JP5.5 N6.2 | length 3.2
  Top Layer w0.635: JP5.5@54,107.81 54.06,107.87 57.09,107.87 N6.2@57.15,107.93
NetJP1_6: JP5.6 N6.1 | length 3.2
  Top Layer w0.635: JP5.6@54,110.35 54.06,110.41 57.09,110.41 N6.1@57.15,110.47
NetJP3_2: JP11.2 R99.2 R100.1 | length 4.6
  Top Layer w0.254: R100.1@125.594,65.587 R99.2@125.594,64.013 125.594,63.886 125.848,63.632 125.975,63.632 126.766,62.841 JP11.2@128.049,62.841
NetJP5_3: JP4.3 Q1.3 | length 4.3
  Top Layer w0.635: JP4.3@53.927,85.07 54.837,84.16 Q1.3@57.827,84.16
NetJP7_5: JP6.5 R33.1 R113.1 | length 5.5
  Top Layer w0.254: R33.1@73.913,64.1 74.839,64.1 75.339,64.6 JP6.5@76.46,64.6
  Bottom Layer w0.254: R113.1@73.913,64.1 74.839,64.1 75.339,64.6 JP6.5@76.46,64.6
NetJP7_7: JP6.7 R47.1 R110.1 | length 11.9
  Top Layer w0.254: JP6.7@76.46,67.14 77.72,68.4 81.174,68.4 81.555,68.019 R47.1@81.682,68.019
  Bottom Layer w0.254: JP6.7@76.46,67.14 77.72,68.4 81.153,68.4 81.301,68.251 81.301,68.173 81.555,67.919 R110.1@81.682,67.919
NetJP7_8: JP6.8 R32.1 R114.1 | length 11.2
  Top Layer w0.254: R32.1@73.913,65.906 73.919,65.9 77.76,65.9 JP6.8@79,67.14
  Bottom Layer w0.254: R114.1@73.913,65.906 77.766,65.906 JP6.8@79,67.14
NetJP7_9: JP6.9 R49.1 R109.1 | length 12
  Top Layer w0.254: JP6.9@76.46,69.68 77.78,71 80.96,71 81.306,71.346 81.56,71.6 R49.1@81.687,71.6
  Bottom Layer w0.254: JP6.9@76.46,69.68 77.78,71 80.96,71 81.56,71.6 R109.1@81.687,71.6
NetJP7_10: JP6.10 R48.1 R111.1 | length 5.5
  Top Layer w0.254: JP6.10@79,69.68 81.563,69.68 R48.1@81.683,69.8
  Bottom Layer w0.254: JP6.10@79,69.68 81.562,69.68 R111.1@81.682,69.8
NetJP7_11: JP6.11 R46.1 R112.1 | length 11.8
  Top Layer w0.254: JP6.11@76.46,72.22 77.84,73.6 81.461,73.6 R46.1@81.676,73.385
  Bottom Layer w0.254: JP6.11@76.46,72.22 77.84,73.6 81.461,73.6 R112.1@81.676,73.385
NetL1_1: L1.1 U1.3 | length 4.1
  Top Layer w1.27: L1.1@8.1,37.4 8.115,37.385 12.185,37.385 U1.3@12.2,37.37
NetL3_2: L3.2 N16.6 | length 2.1
  Bottom Layer w0.5: L3.2@127.993,23.338 128.15,23.181 128.15,21.345 N16.6@128.2,21.295
NetLED1_1: LED1.1 R78.2 | length 2.3
  Top Layer w0.381: LED1.1@106.6,40.11 106.641,40.11 107,39.75 R78.2@107,37.963
NetN5_1: N11.1 Q5.1 R84.1 | length 4
  Top Layer w0.5: R84.1@113.35,101.787 115.15,101.787 N11.1@115.2,101.837 ; Q5.1@115.2,99.8 N11.1@115.2,101.837 ; N11.1@115.2,101.837 115.2,101.905 N11.1@115.2,101.837
NetN14_1: N12.1 R91.1 | length 1.5
  Top Layer w0.254: R91.1@118.713,15.1 118.763,15.05 N12.1@120.205,15.05
NetN14_4: N12.4 R97.2 | length 2.9
  Top Layer w0.254: N12.4@122.795,13.15 122.795,10.505 R97.2@123,10.3
NetN15_4: N14.4 R95.1 R98.2 | length 3.2
  Top Layer w0.5: R95.1@121.413,35 123.032,35 123.05,35.018 ; N14.4@123.05,35.705 123.05,35.018 ; R98.2@123.187,34.2 123.181,34.2 123.05,34.331 123.05,35.018
NetN16_3: N16.3 R107.2 | length 2
  Bottom Layer w0.254: N16.3@126.3,18.695 126.3,16.9 R107.2@126.45,16.75
NetQ2_1: Q1.1 Q2.3 R21.1 | length 5.2
  Top Layer w0.508: Q1.1@59.894,83.21 61.9,83.21 R21.1@62.51,83.21 ; R21.1@62.3,83.287 63.679,83.287 64.196,83.804 64.404,83.804 Q2.3@64.6,84
NetQ3_3: Q5.3 R80.2 R82.2 R83.2 | length 6.6
  Top Layer w0.5: R80.2@109.813,98 115.625,98 116.15,97.475 Q5.3@116.15,97.45
NetQ4_1: Q2.1 R26.2 R31.2 | length 4
  Top Layer w0.381: Q2.1@66.84,83.05 66.915,83.125 70.712,83.125 R31.2@70.787,83.2
NetR7_1: R78.1 U4.40 | length 5
  Top Layer w0.381: R78.1@107,36.337 107,36.21 107.4,35.81 107.4,35.1 U4.40@107.4,31.5
NetR26_2: R100.2 U3.6 | length 25.2
  Top Layer w0.254: U3.6@105.4,64.762 109.162,64.762 115.2,70.8 123.832,70.8 125.594,69.038 R100.2@125.594,67.213
NetR32_1: R93.1 U4.26 | length 4.4
  Top Layer w0.254: U4.26@113.7,24.4 115.4,24.4 116.6,23.2 R93.1@117.587,23.2
NetR70_2: R130.1 R131.2 | length 1.4
  Bottom Layer w0.635: R130.1@26.4,98.613 R131.2@26.4,99.987
NetR71_2: R14.2 R15.1 | length 1.6
  Top Layer w0.635: R14.2@28.892,108 R15.1@30.466,108
NetR72_2: R135.1 R136.2 | length 1.5
  Bottom Layer w0.635: R135.1@18.39,98.487 R136.2@18.39,99.977
NetR73_2: R3.2 R5.1 | length 1.6
  Top Layer w0.635: R3.2@15.013,109.6 R5.1@16.587,109.6
NetR74_2: R137.1 R138.2 | length 1.4
  Bottom Layer w0.635: R137.1@10.8,98.6 R138.2@10.8,100
NetR75_2: R2.2 R4.1 | length 1.6
  Top Layer w0.635: R2.2@12.426,113.2 R4.1@14,113.2
NetR77_2: R15.2 R17.1 | length 1.6
  Top Layer w0.635: R15.2@32.092,108 R17.1@33.666,108
NetR79_2: R5.2 R8.1 | length 1.6
  Top Layer w0.635: R5.2@18.213,109.6 R8.1@19.787,109.6
NetR81_2: R4.2 R6.1 | length 1.6
  Top Layer w0.635: R4.2@15.626,113.2 R6.1@17.2,113.2
NetR82_2: R17.2 R19.1 | length 1.8
  Top Layer w0.635: R17.2@35.292,108 35.298,108.006 37.073,108.006 R19.1@37.079,108.013
NetR83_2: R8.2 R12.1 | length 1.6
  Top Layer w0.635: R8.2@21.413,109.6 R12.1@22.987,109.6
NetR84_2: R6.2 R10.1 | length 1.6
  Top Layer w0.635: R6.2@18.826,113.2 R10.1@20.387,113.2
NetR91_1: R37.1 R38.1 R42.2 | length 3.5
  Top Layer w0.254: R38.1@75.213,56.5 R37.1@75.213,54.7 R42.2@76.887,54.7
NetR108_2: R128.1 R133.2 | length 1.7
  Bottom Layer w0.635: R133.2@23.683,18.462 23.693,18.471 25.328,18.471 R128.1@25.337,18.481
NetR109_2: R125.1 R128.2 | length 1.6
  Bottom Layer w0.635: R128.2@26.963,18.481 R125.1@28.524,18.481
NetR110_2: R122.1 R125.2 | length 1.6
  Bottom Layer w0.635: R125.2@30.15,18.481 R122.1@31.737,18.481
NetR111_2: R117.1 R118.1 R122.2 | length 3.4
  Bottom Layer w0.635: R122.2@33.363,18.481 R118.1@34.937,18.481 R117.1@34.937,16.7
NetR117_2: R127.1 R132.2 | length 1.6
  Bottom Layer w0.635: R132.2@23.768,14.781 R127.1@25.342,14.781
NetR118_2: R124.1 R127.2 | length 1.6
  Bottom Layer w0.635: R127.2@26.968,14.781 R124.1@28.542,14.781
NetR119_2: R121.1 R124.2 | length 1.6
  Bottom Layer w0.635: R124.2@30.168,14.781 R121.1@31.742,14.781
NetR120_2: R115.1 R116.1 R121.2 | length 3.2
  Bottom Layer w0.635: R121.2@33.368,14.781 R116.1@34.942,14.781 R115.1@34.942,13.181
NetR128_2: R129.1 R134.2 | length 1.6
  Bottom Layer w0.635: R134.2@23.679,11.335 R129.1@25.253,11.335
NetR129_2: R126.1 R129.2 | length 1.6
  Bottom Layer w0.635: R129.2@26.879,11.335 R126.1@28.453,11.335
NetR130_2: R123.1 R126.2 | length 1.6
  Bottom Layer w0.635: R126.2@30.079,11.335 R123.1@31.653,11.335
NetR131_2: R119.1 R120.1 R123.2 | length 3.4
  Bottom Layer w0.635: R123.2@33.279,11.335 R120.1@34.853,11.335 R119.1@34.853,9.535
NRST: C73.1 R101.1 U3.7 | length 32.7
  Top Layer w0.254: U3.7@105.4,65.254 108.854,65.254 115.2,71.6 129.2,71.6 130.713,70.087 C73.1@130.713,67.9 130.7,67.887 R101.1@130.7,65.913
OUT: C80.1 D16.2 L3.1 N14.5 N16.4 R98.1 R105.1 R106.1 | length 18.2
  Top Layer w0.5: v1(124.8,32.4) v1(124.8,33.1) 124.806,33.106 R98.1@124.806,34.194 ; R98.1@124.813,34.2 R98.1@124.806,34.194 ; N14.5@124.95,35.705 124.95,34.331 124.813,34.194 R98.1@124.806,34.194
  Bottom Layer w0.5: C80.1@124.65,21.35 124.65,22.28 L3.1@125.707,23.338 ; v1(124.8,33.1) v1(124.8,32.4) 124.8,24.245 L3.1@125.707,23.338 ; N16.4@126.3,21.295 126.3,22.745 L3.1@125.707,23.338
PA5: R85.1 R86.2 U3.21 | length 24.8
  Top Layer w0.254: U3.21@101.359,71.8 101.359,78.359 104.8,81.8 110.2,81.8 113.587,85.187 R85.1@113.587,86.6
  Top Layer w0.5: R85.1@113.587,86.6 R86.2@113.587,88.4
PA6: R71.1 U3.22 | length 10.6
  Top Layer w0.254: R71.1@100.813,82.418 100.851,82.379 U3.22@100.851,71.8
PA7: pad.4 U3.23 | length 8.8
  Top Layer w0.254: pad.4@99,80 100.359,78.641 U3.23@100.359,71.8
PB0: R41.1 R45.1 U3.26 | length 46.7
  Top Layer w0.254: v1(84.4,95.6) 88.8,91.2 88.8,83 92.695,79.105 95.778,79.105 95.783,79.1 96,79.1 98.876,76.224 98.876,71.817 U3.26@98.859,71.8
  Top Layer w0.381: v1(77.838,104.162) 77.838,105.124 R41.1@77.895,105.181 77.902,105.187 79.476,105.187 R45.1@79.482,105.194
  Bottom Layer w0.254: v1(77.838,104.162) 77.851,104.149 79.638,104.149 84.4,99.388 84.4,97.551 v1(84.4,95.6)
PB1: R39.1 R43.1 U3.27 | length 40.3
  Top Layer w0.254: v1(83.4,95.6) 88.1,90.9 88.1,82.7 92.4,78.4 95.8,78.4 98.359,75.841 U3.27@98.359,71.8
  Top Layer w0.305: R39.1@77.695,99.981 79.27,99.981 R43.1@79.282,99.994 79.289,100 v1(80.4,100)
  Bottom Layer w0.254: v1(80.4,100) 83.4,97 v1(83.4,95.6)
PC0: C82.1 R97.1 R118.2 U3.8 | length 192.4
  Top Layer w0.254: U3.8@105.4,65.754 108.554,65.754 114.9,72.1 129.9,72.1 132.8,69.2 132.8,49.597 135.203,47.194 135.203,17.203 133.8,15.8 126.9,15.8 124.6,13.5 v1(124.6,11.3) 124.6,10.326 R97.1@124.626,10.3
  Bottom Layer w0.254: R118.2@36.563,18.481 40.632,18.481 C82.1@40.7,18.413 41.987,18.413 46.535,13.865 59.733,13.865 59.767,13.9 72.014,13.9 76.814,9.1 122.4,9.1 v1(124.6,11.3)
PC1: C83.1 R116.2 U3.9 | length 192.1
  Top Layer w0.254: U3.9@105.4,66.254 108.254,66.254 114.7,72.7 130.2,72.7 133.4,69.5 133.4,50 135.703,47.697 135.703,16.703 134.051,15.051 127.376,15.051 125.8,13.475 v1(125.8,11.3)
  Bottom Layer w0.254: R116.2@36.568,14.781 36.599,14.813 C83.1@40.6,14.813 42.987,14.813 44.417,13.383 71.8,13.383 76.6,8.583 123.083,8.583 v1(125.8,11.3)
PC2: C84.1 R120.2 U3.10 | length 194.5
  Top Layer w0.254: U3.10@105.4,66.754 108.054,66.754 114.7,73.4 130.6,73.4 134,70 134,50.3 136.203,48.097 136.203,16.203 134.2,14.2 127.6,14.2 126.9,13.5 v1(126.9,11.3)
  Bottom Layer w0.254: R120.2@36.479,11.335 40.522,11.335 40.6,11.413 42.713,11.413 44.2,12.9 71.6,12.9 76.4,8.1 123.7,8.1 v1(126.9,11.3)
PC3: R107.1 R108.1 U3.11 | length 102.1
  Top Layer w0.254: U3.11@105.4,67.254 107.754,67.254 114.6,74.1 131,74.1 134.5,70.6 134.5,50.6 136.7,48.4 136.7,15.8 134.238,13.338 v1(127.838,13.338)
  Bottom Layer w0.254: R107.1@126.45,15.125 126.45,13.35 R108.1@126.463,13.338 v1(127.838,13.338)
PC4: R40.1 R44.1 U3.24 | length 53.9
  Top Layer w0.254: R44.1@79.29,108.6 88,108.6 91.4,105.2 91.4,82.2 93.2,80.4 96.5,80.4 99.859,77.041 U3.24@99.859,71.8
  Top Layer w0.381: R40.1@77.695,108.581 77.702,108.574 79.276,108.574 R44.1@79.282,108.568
PC5: C23.1 R59.1 U3.25 | length 32.4
  Top Layer w0.254: C23.1@89.6,96.387 89.6,83.1 93,79.7 96.3,79.7 99.359,76.641 U3.25@99.359,71.8
  Top Layer w0.381: R59.1@87.8,96.387 C23.1@89.6,96.387
RESET: C38.1 R69.1 U3.54 U4.1 | length 50.6
  Top Layer w0.254: U3.54@98.359,60.2 98.359,57.577 96.9,56.117 89.517,56.117 88.048,54.648 88.048,39.152 90.7,36.5 95.782,36.5 96.6,35.683 96.6,33.3 97.208,32.692 C38.1@98.986,32.692 R69.1@100.592,32.692 ; R69.1@100.592,32.692 100.592,30.808 101.4,30 U4.1@102.7,30
RS485_RX: JP7.9 U3.52 | length 83.5
  Top Layer w0.254: JP7.9@93.2,4 93.2,5.6 92,6.8 85.7,6.8 76.8,15.7 76.8,33.2 78.252,34.652 84.807,34.652 87.03,36.876 87.03,55.43 88.717,57.117 96.317,57.117 97.359,58.159 U3.52@97.359,60.2
RS485_TX: JP7.8 U3.51 | length 82
  Top Layer w0.254: JP7.8@91.2,4 91.2,5.3 90.2,6.3 85.518,6.3 76.317,15.5 76.317,33.4 78.052,35.135 84.607,35.135 86.548,37.076 86.548,55.848 88.3,57.6 96.1,57.6 96.859,58.359 U3.51@96.859,60.2
SCL: N9.6 N17.6 R68.1 U3.58 | length 15
  Top Layer w0.254: U3.58@100.359,60.2 100.359,56.341 102.108,54.592 R68.1@102.108,52.941 102.188,52.941 102.442,52.687 N9.6@102.442,51.031 v1(102.442,48.341)
  Bottom Layer w0.254: N17.6@102.442,46.081 v1(102.442,48.341)
SCLK: C52.2 U3.57 U4.36 | length 53.8
  Top Layer w0.254: U3.57@99.859,60.2 99.859,56.759 97.77,54.67 91.97,54.67 91.66,54.36 91.66,45.34 92.117,44.883 109.217,44.883 111.083,43.017 111.083,34.583 110.6,34.1 U4.36@110.6,31.5
SDA: N9.5 N17.5 R74.2 U3.59 | length 15.4
  Top Layer w0.254: U3.59@100.859,60.2 100.859,56.941 103.794,54.006 R74.2@103.794,52.956 103.712,52.873 N9.5@103.712,51.031 103.706,51.025 v1(103.706,48.294)
  Bottom Layer w0.254: v1(103.706,48.294) 103.706,46.087 N17.5@103.712,46.081
SWCLK: JP10.2 R67.2 U3.49 | length 9.9
  Top Layer w0.254: R67.2@94.6,50.913 94.6,52.529 JP10.2@95.47,53.4 ; v1(95.3,58.4) 95.859,58.959 U3.49@95.859,60.2
  Bottom Layer w0.254: v1(95.3,58.4) 95.368,58.332 95.368,53.502 JP10.2@95.47,53.4
SWDIO: JP10.4 R60.2 U3.46 | length 15.3
  Top Layer w0.254: v1(90.3,58.386) 90.3,62.3 91.254,63.254 U3.46@93.8,63.254 ; JP10.4@90.39,53.4 90.39,50.923 R60.2@90.4,50.913
  Bottom Layer w0.254: v1(90.3,58.386) 90.345,58.341 90.345,53.445 JP10.4@90.39,53.4
V1N: C28.2 R62.1 U4.4 | length 10.6
  Top Layer w0.254: C28.2@94.613,31.4 R62.1@94.613,29.8 99,29.8 101.2,27.6 U4.4@102.7,27.6
V1P: C29.2 R63.1 U4.3 | length 12.3
  Top Layer w0.254: R63.1@94.613,34.8 C29.2@94.613,33 ; U4.3@102.7,28.4 101.2,28.4 99.2,30.4 97.34,30.4 C29.2@94.994,32.746 ; C29.2@94.613,33 94.74,33 C29.2@94.994,32.746 ; C29.2@94.613,33 94.867,32.746 C29.2@94.994,32.746
V2P: C39.1 R9.2 R10.2 R73.1 U4.13 | length 184.3
  Top Layer w0.254: C39.1@99.419,15.118 R73.1@101.019,15.118 v1(101.019,16.135) v1(101.019,16.819) 101.4,17.2 104,17.2 105,18.2 U4.13@105,20.5
  Top Layer w0.381: R10.2@22.013,113.2 R9.2@22.013,111.6 46.9,111.6 52.3,106.2 52.3,83.5 56.2,79.6 v1(56.2,66.6) v1(56.2,65.9)
  Bottom Layer w0.381: v1(56.2,66.6) v1(56.2,65.9) 56.2,61.9 59.5,58.6 59.5,19 61.4,17.1 73.411,17.1 79.011,11.5 99.7,11.5 101.019,12.819 v1(101.019,16.135) v1(101.019,16.819)
V3N: C31.2 R65.1 U4.7 | length 12
  Top Layer w0.254: C31.2@94.709,20.188 R65.1@94.709,21.987 94.836,21.987 96,23.151 96,24.6 96.6,25.2 U4.7@102.7,25.2
V3P: C26.2 R61.1 U4.6 | length 9.9
  Top Layer w0.254: C26.2@94.613,24.194 R61.1@94.613,25.994 94.619,26 U4.6@102.7,26
V4P: C48.1 R11.2 R12.2 R79.1 U4.16 | length 185
  Top Layer w0.254: C48.1@105.819,15.118 R79.1@107.419,15.118 107.4,15.136 v1(107.4,16.176) v1(107.4,16.878) U4.16@107.4,20.5
  Top Layer w0.381: R11.2@24.613,107.8 R12.2@24.613,109.6 46.9,109.6 51.5,105 51.5,82.9 55.1,79.3 v1(55.1,66.6) v1(55.1,65.9)
  Bottom Layer w0.381: v1(55.1,66.6) v1(55.1,65.9) 55.1,61.444 58.4,58.144 58.4,18.544 60.944,16 72.956,16 78.252,10.704 105.745,10.704 107.4,12.36 v1(107.4,16.176) v1(107.4,16.878)
V5N: C30.2 R64.1 U4.10 | length 16
  Top Layer w0.254: C30.2@94.708,12.2 R64.1@94.708,13.8 94.835,13.8 95.089,14.054 95.089,14.066 96.508,15.485 96.508,20.108 97.3,20.9 99.9,20.9 101.8,22.8 U4.10@102.7,22.8
V5P: C32.2 R66.1 U4.9 | length 12.9
  Top Layer w0.254: C32.2@94.718,16.2 R66.1@94.718,18 94.845,18 95.099,18.254 95.099,18.299 96,19.2 96,20.5 97,21.5 99.7,21.5 101.8,23.6 U4.9@102.7,23.6
V6P: C54.2 R16.2 R19.2 R90.2 R91.2 U4.19 | length 181
  Top Layer w0.254: U4.19@109.8,20.5 109.8,19.321 v1(112.546,16.574) v1(113.082,16.039) 113.876,15.245 C54.2@113.876,15.118 R90.2@115.476,15.118 117.07,15.118 R91.2@117.087,15.1
  Top Layer w0.381: R16.2@35.292,106.2 36.892,106.2 R19.2@37.079,106.387 48.313,106.387 50.6,104.1 50.6,82.4 54,79 v1(54,66.6) v1(54,65.9)
  Bottom Layer w0.381: v1(54,66.6) v1(54,65.9) 54,60.989 57.3,57.689 57.3,18.089 60.489,14.9 72.5,14.9 77.5,9.9 111,9.9 113.082,11.982 v1(113.082,16.039) v1(112.546,16.574)
V+: CR1.2 D8.1 D9.2 DZ1.2 N4.3 N5.3 N6.3 R92.1 | length 115.1
  Top Layer w0.635: 60.45,102.167 61.013,102.73 60.45,103.293 ; N4.3@63.65,97.53 61.27,97.53 60.4,98.4 60.4,102.642 ; N5.3@63.65,102.73 60.488,102.73 60.4,102.642 ; N6.3@63.65,107.93 60.963,107.93 ; CR1.2@94.4,100.667 94.4,105.4 86.4,113.4 62,113.4 60.4,111.8 60.4,108.493 ; v1(101.35,96.186) v1(101.35,96.831) D8.1@101.35,98.8 ; R92.1@117.4,68.2 v1(117.4,69.3) v1(117.4,70) ; 60.4,102.642 60.4,107.367 ; 60.4,107.367 60.4,107.953 ; 60.4,107.367 60.963,107.93 ; 60.4,107.953 60.4,108.493 ; 60.4,107.953 60.423,107.93 60.963,107.93 ; 60.4,108.493 60.963,107.93
  Bottom Layer w0.635: v1(101.35,96.831) v1(101.35,96.186) 113.314,96.186 117.4,92.1 v1(117.4,70) v1(117.4,69.3)
VOUT: C22.2 C33.1 C46.1 IC1.4 N10.2 N11.5 SW1.3 | length 20.6
  Top Layer w0.381: IC1.4@87.5,103.8 87.506,103.806 89.593,103.806 C22.2@89.6,103.813 ; C22.2@89.8,103.813 C22.2@89.6,103.813 ; v1(90.6,103.8) 90.594,103.806 89.606,103.806 C22.2@89.6,103.813 ; SW1.3@114.65,109.6 114.65,108.439 115.2,107.889 N11.5@115.2,104.495
  Bottom Layer w0.381: v1(90.6,103.8) 95,103.8 98.86,107.66 C33.1@98.86,109.8
WP: N9.7 N17.7 U3.61 | length 26.7
  Top Layer w0.254: N9.7@101.172,51.031 101.186,51.016 101.186,47.514 v1(101.2,47.5) 106.4,47.5 107.3,48.4 107.3,53.9 106,55.2 104.018,55.2 101.859,57.359 U3.61@101.859,60.2
  Bottom Layer w0.254: N17.7@101.172,46.081 101.186,46.095 101.186,47.486 v1(101.2,47.5)
反转: N8.3 U3.39 | length 28.8
  Top Layer w0.254: N8.3@81.165,48.075 81.165,62.465 85.454,66.754 U3.39@93.8,66.754
时钟IO: JP7.5 U3.44 | length 78.5
  Top Layer w0.254: JP7.5@85.2,4 85.079,4.121 85.079,6.031 75.817,15.293 75.817,33.607 77.845,35.635 84.4,35.635 86.048,37.283 86.048,61.765 88.537,64.254 U3.44@93.8,64.254
显示预留: JP7.10 U3.41 | length 93.9
  Top Layer w0.254: v1(80.2,6.2) 80.2,8.863 74.37,14.693 74.37,34.207 77.246,37.083 83.8,37.083 84.6,37.883 84.6,62.365 87.989,65.754 U3.41@93.8,65.754
  Bottom Layer w0.254: v1(80.2,6.2) 94.24,6.2 95.2,5.24 JP7.10@95.2,4
正转: N8.2 U3.40 | length 27.5
  Top Layer w0.254: N8.2@82.435,48.075 82.435,62.835 85.854,66.254 U3.40@93.8,66.254
漏电: R31.1 U3.28 | length 32.3
  Top Layer w0.254: R31.1@72.413,83.2 86.7,83.2 92.1,77.8 95.446,77.8 97.859,75.387 U3.28@97.859,71.8
电机: R42.1 U3.38 | length 24
  Top Layer w0.254: R42.1@78.513,54.7 78.64,54.7 80.4,56.46 80.4,62.5 85.154,67.254 U3.38@93.8,67.254
载波_EVENTOUT: R46.2 U3.34 | length 13.3
  Top Layer w0.254: R46.2@83.301,73.385 83.428,73.385 84.9,71.913 84.9,70 85.646,69.254 U3.34@93.8,69.254
载波_RST: R49.2 U3.35 | length 12.2
  Top Layer w0.254: R49.2@83.313,71.6 83.44,71.6 84.3,70.74 84.3,69.9 85.446,68.754 U3.35@93.8,68.754
载波_RX: R32.2 U3.30 | length 37
  Top Layer w0.254: R32.2@72.287,65.906 72.287,73.369 75.41,76.492 95.09,76.492 96.851,74.731 U3.30@96.851,71.8
载波_SET: R47.2 U3.37 | length 10.5
  Top Layer w0.254: R47.2@83.435,68.019 83.435,68.008 83.689,67.754 U3.37@93.8,67.754
载波_STA: R48.2 U3.36 | length 11.1
  Top Layer w0.254: R48.2@83.308,69.8 83.435,69.8 84.981,68.254 U3.36@93.8,68.254
载波_TX: R33.2 U3.29 | length 42
  Top Layer w0.254: R33.2@72.287,64.1 71.3,64.1 70.9,64.5 70.9,72.7 75.2,77 95.3,77 97.359,74.941 U3.29@97.359,71.8
pads on no net: BLE1.3 BLE1.4 BLE1.8 BLE1.9 JP1.3 JP1.4 JP1.5 JP1.6 JP2.2 JP2.4 JP2.6 JP3.2 JP3.3 JP3.5 JP3.6 JP3.8 JP3.9 JP6.6 JP6.12 N8.1 N8.7 SW1.1 U2.5 U3.45 U3.50 U4.21 U4.22 U4.25 U4.29 U4.30 U4.31
copper on no net: | length 5.9
  Top Layer w0.254: 88.6,62 90.354,63.754 93.8,63.754

## Polygon pours and split planes (outlines as drawn)
GND on Bottom Layer "GND_L02_P000" (solid, remove dead copper, pour order 0): 137,115 52.843,115 52.843,28.488 48.066,23.711 0,23.711 0,0 100,0 100,7 126,7 126,0 137,0
GND on Top Layer "GND_L01_P001" (solid, remove dead copper, pour order 1): 137,115 52.843,115 52.843,28.488 48.066,23.711 0,23.711 0,0 100,0 100,7 126,7 126,0 137,0

## Other copper
Top Layer:
  rectangle net GND: 81.6,103.15 83.4,104.45
  rectangle net GND: 100.932,45.556 105.1,46.606
  rectangle net GND: 113.2,29.015 114.2,30.185
  rectangle net GND: 113.2,21.815 114.2,22.985
  rectangle net NetC64_1: 82.105,40.8 84,41.581
  rectangle net NetC64_2: 79.6,40.8 81.495,41.581
  rectangle net NetC70_1: 63.45,43.35 68.15,45.634
  pour cut-out: 137,114 ccw(c136,114) 136,115 137,115
  pour cut-out: 136,0 ccw(c136,1) 137,1 137,0
  pour cut-out: 126,1 ccw(c127,1) 127,0 126,0
  pour cut-out: 99,0 ccw(c99,1) 100,1 100,0
  pour cut-out: 0,1 ccw(c1,1) 1,0 0,0
  pour cut-out: 114.6,22.6
  pour cut-out: 87.03,75.618 89.57,75.618 89.574,73.182 87.03,73.182
  pour cut-out: 76.46,63.331 79.391,63.331 79.86,62.862 80.27,63.271 80.27,63.564 76.693,63.564
  pour cut-out: 85.619,96.203 85.619,96.581 85.5,96.7 85.5,96.322
  pour cut-out: 89.676,97.403 89.985,97.094 91.4,97.094 91.091,97.403
  pour cut-out: 100.997,18.511 100.997,17.845 101.231,17.611 101.231,18.277
  pour cut-out: 135.777,101.087 135.89,101.2 137.2,101.2 137.087,101.087
  pour cut-out: 86.908,9.992 86.908,7.308 86.8,7.2 86.8,9.884
  pour cut-out: 115.216,65.108 115.285,65.177 115.285,65.838 115.216,65.768
  pour cut-out: 126.37,65.128 129.775,65.128 129.902,65 126.498,65
  pour cut-out: 129.698,59.551 132.151,59.551 132.4,59.8 129.947,59.8
  pour cut-out: 113.111,51.365 113.111,47.711 113,47.6 113,51.254
  pour cut-out: 68.998,57.291 69.133,57.427 69.133,58.013 68.998,57.877
  pour cut-out: 63.843,53.242 60.158,53.242 59.8,53.6 63.485,53.6
  pour cut-out: 56.905,79.6 60.2,79.6 60.4,79.8 57.105,79.8
  pour cut-out: 66.6,85.767 66.527,85.84 66.527,86.36 66.6,86.287
  pour cut-out: 100.895,19.781 99.879,19.781 99.625,20.035 99.625,20.225 99.8,20.4 100.886,20.4 100.997,20.289
  pour cut-out: 99.625,20.035
  pour cut-out: 84.328,34 93.787,34 93.8,34.013 93.8,14.391 93.59,14.181 85.027,14.181 84.3,14.908
  pour cut-out: 115.851,41.035 116.105,40.781 117.121,40.781 116.867,41.035
  pour cut-out: 93.597,28.435
  pour cut-out: 106.2,19.4 106.2,19 106.6,18.6 107,19 107,19.4
  pour cut-out: 77.8,2.282 86.682,2.282 86.8,2.4 77.918,2.4
  pour cut-out: 56.2,65.08 52.72,65.08 52.6,65.2 56.08,65.2
  pour cut-out: 48.1,19.227 48.896,19.227 51.168,16.954
  pour cut-out: 10.019,7.5 10.019,19.381 9.9,19.5 9.9,7.619
  pour cut-out: 0.896,7.204 0.083,7.204 0,7.287 0.813,7.287
  region net GND: 115.313,62.669 115.313,60.969 121.113,60.969 121.113,62.669
  region net +24V: 56.05,5.896 56.05,15.562 55.462,16.15 54.138,16.15 53.6,15.612 53.6,6.604 52.888,5.892
  region net +24V: 11.1,5.119 11.1,3.59 11.79,2.9 55.65,2.9 56.05,3.3 56.05,5.896 11.878,5.896
  region net +12V: 105.236,103.95 104.85,103.564 104.85,96.95 105,96.8 108.4,96.8 108.695,97.095 108.695,103.635 108.38,103.95
  region net V+: 93.542,102.35 93.13,101.938 93.13,99.27 93.9,98.5 101.794,98.5 102.35,99.056 102.35,101.95 101.95,102.35
  region net VOUT: 98.299,108.95 98.01,109.239 98.01,111.41 98.39,111.79 115.21,111.79 115.6,111.4 115.6,109.464 115.086,108.95
  region net +12V: 65.41,23.99 65.6,23.8 65.6,21.6 65.45,21.45 57,21.45 57,23.99
  region net +12V_OUT: 77.753,4.75 69.95,4.75 69.8,4.6 69.8,3 70,2.8 77.8,2.8 77.95,2.95 77.95,4.553
  region: 32.661,7.879
Bottom Layer:
  rectangle net GND: 0.896,4.996 3.104,7.204
  rectangle net GND: 99.662,50.506 103.952,51.556
  pour cut-out: 137,114 ccw(c136,114) 136,115 137,115
  pour cut-out: 136,0 ccw(c136,1) 137,1 137,0
  pour cut-out: 126,1 ccw(c127,1) 127,0 126,0
  pour cut-out: 99,0 ccw(c99,1) 100,1 100,0
  pour cut-out: 0,1 ccw(c1,1) 1,0 0,0
  pour cut-out: 132.682,81.27 132.682,78.73 135.118,78.73 135.118,81.27
  pour cut-out: 127.458,32.058 127.2,31.8 126.4,31.8 126.658,32.058
  pour cut-out: 55.297,87.61 55.297,85.07 53.927,83.7 52.874,83.7 52.657,83.917 52.657,86.34 53.927,87.61
  pour cut-out: 54,111.72 55.37,110.35 55.37,99.02 55.358,99.008 53.392,99.008 53.2,99.2
  pour cut-out: 77.718,60.778 78.989,60.778 79,60.789 79,58.251 77.729,58.251 77.718,58.262
  pour cut-out: 60.531,58.244 60.531,55.724 63.069,55.724 63.069,58.244
  pour cut-out: 54,67.42 52.62,67.42 52.4,67.2 53.78,67.2
  pour cut-out: 81.712,40.158 81.7,40.17 80.53,40.17 80.53,37.43 80.542,37.442 81.712,37.442
  pour cut-out: 77.883,25.7 77.883,19.517 79.2,18.2 80.517,19.517 80.517,25.7
  pour cut-out: 69.416,8.982 69.416,3.902 70.685,2.633 71.954,3.902 71.954,8.982
  pour cut-out: 78.458,2.747 95.347,2.747 95.6,3 78.711,3
  pour cut-out: 78.458,5.258 79.561,5.258 80.06,5.757
  region net GND: 32.2,95.594 36.806,95.594 43.354,89.046 55.031,89.046 55.031,96.3 50.3,96.3 42.15,104.45 33.63,104.45 33.63,98.995 32.2,97.565
  pour cut-out: 16.629,9.004 18.113,9.004 18.113,9.387 18.1,9.4 16.6,9.4
  pour cut-out: 1.396,7.204 -0.004,7.204 -0.1,7.3 1.3,7.3

## Silkscreen, mask and mechanical layers (free items; w line width, h text height)
Top Overlay:
  text "GND" at 93.189,55.272 h0.6 r90
  text "SWDIO" at 90.68,55.12 h0.6 r90
  text "SWCLK" at 95.68,55.12 h0.6 r90
  text "+3.3V" at 98.48,55.12 h0.6 r90
Mechanical 1:
  lines w0.1: 0,1 ccw(c1,1) 1,0 99,0 ccw(c99,1) 100,1 100,6 cw(c101,6) 101,7 125,7 cw(c125,6) 126,6 126,1 ccw(c127,1) 127,0 136,0 ccw(c136,1) 137,1 137,114 ccw(c136,114) 136,115 1,115 ccw(c1,114) 0,114 0,1
  lines w0.2: 8.7,19.745 8.7,23.745 48.1,23.745 48.1,19.745 8.7,19.745 ; 12.745,71.8 12.745,83.5 15.145,83.5 15.145,71.8 12.745,71.8 ; 21.845,71.8 21.845,83.5 24.245,83.5 24.245,71.8 21.845,71.8 ; 30.846,71.8 33.246,71.8 33.246,83.5 30.846,83.5 30.846,71.8 ; 46.966,26.4 46.966,36.2 50.966,36.2 50.966,26.4 46.966,26.4
Mechanical 5:
  lines w0.1: 6.5,5.75 ccw(c6.5,7.5) 6.5,9.25 ccw(c6.5,7.5) 6.5,5.75 ; 6.5,105.75 ccw(c6.5,107.5) 6.5,109.25 ccw(c6.5,107.5) 6.5,105.75 ; 6.882,27.134 6.882,27.634 7.382,27.634 7.382,27.134 6.882,27.134 ; 6.882,29.674 6.882,30.174 7.382,30.174 7.382,29.674 6.882,29.674 ; 6.882,32.214 6.882,32.714 7.382,32.714 7.382,32.214 6.882,32.214 ; 6.882,34.754 6.882,35.254 7.382,35.254 7.382,34.754 6.882,34.754 ; 6.882,37.294 6.882,37.794 7.382,37.794 7.382,37.294 6.882,37.294 ; 6.882,48.134 6.882,48.634 7.382,48.634 7.382,48.134 6.882,48.134 ; 6.882,50.674 6.882,51.174 7.382,51.174 7.382,50.674 6.882,50.674 ; 6.882,53.214 6.882,53.714 7.382,53.714 7.382,53.214 6.882,53.214 ; 6.882,55.754 6.882,56.254 7.382,56.254 7.382,55.754 6.882,55.754 ; 6.882,58.294 6.882,58.794 7.382,58.794 7.382,58.294 6.882,58.294 ; 129.618,27.206 130.118,27.206 130.118,27.706 129.618,27.706 129.618,27.206 ; 129.618,29.746 130.118,29.746 130.118,30.246 129.618,30.246 129.618,29.746 ; 129.618,32.286 130.118,32.286 130.118,32.786 129.618,32.786 129.618,32.286 ; 129.618,34.826 130.118,34.826 130.118,35.326 129.618,35.326 129.618,34.826 ; 129.618,37.366 130.118,37.366 130.118,37.866 129.618,37.866 129.618,37.366 ; 129.618,48.206 130.118,48.206 130.118,48.706 129.618,48.706 129.618,48.206 ; 129.618,50.746 130.118,50.746 130.118,51.246 129.618,51.246 129.618,50.746 ; 129.618,53.286 130.118,53.286 130.118,53.786 129.618,53.786 129.618,53.286 ; 129.618,55.826 130.118,55.826 130.118,56.326 129.618,56.326 129.618,55.826 ; 129.618,58.366 130.118,58.366 130.118,58.866 129.618,58.866 129.618,58.366 ; 130.5,5.75 ccw(c130.5,7.5) 130.5,9.25 ccw(c130.5,7.5) 130.5,5.75 ; 130.5,105.75 ccw(c130.5,107.5) 130.5,109.25 ccw(c130.5,107.5) 130.5,105.75

## Text inside footprints (layer, text, board x,y; h text height)
U1: Top Overlay "+Vo" at 15.4,3.4 h0.8 r90; Top Overlay "-Vo" at 15.4,8.4 h0.8 r90; Top Overlay "-V(CAP)" at 15.4,24.4 h0.8 r90; Top Overlay "+V(CAP)" at 15.4,29.9 h0.8 r90; Top Overlay "AC(L)" at 15.4,35.9 h0.8 r90; Top Overlay "AC(N)" at 15.4,40.9 h0.8 r90